# Altium PCB WiFi_Shield_PCB.PcbDoc
Units mil, origin at the board's own origin, x right, y up, seen from the top; angles counter-clockwise.
Board outline 1771.65 x 1771.65 mil, 2 copper layers (Top Layer, Bottom Layer), stack 61.811 mil thick; 20 components, 15 nets, 87 pads, 52 vias.
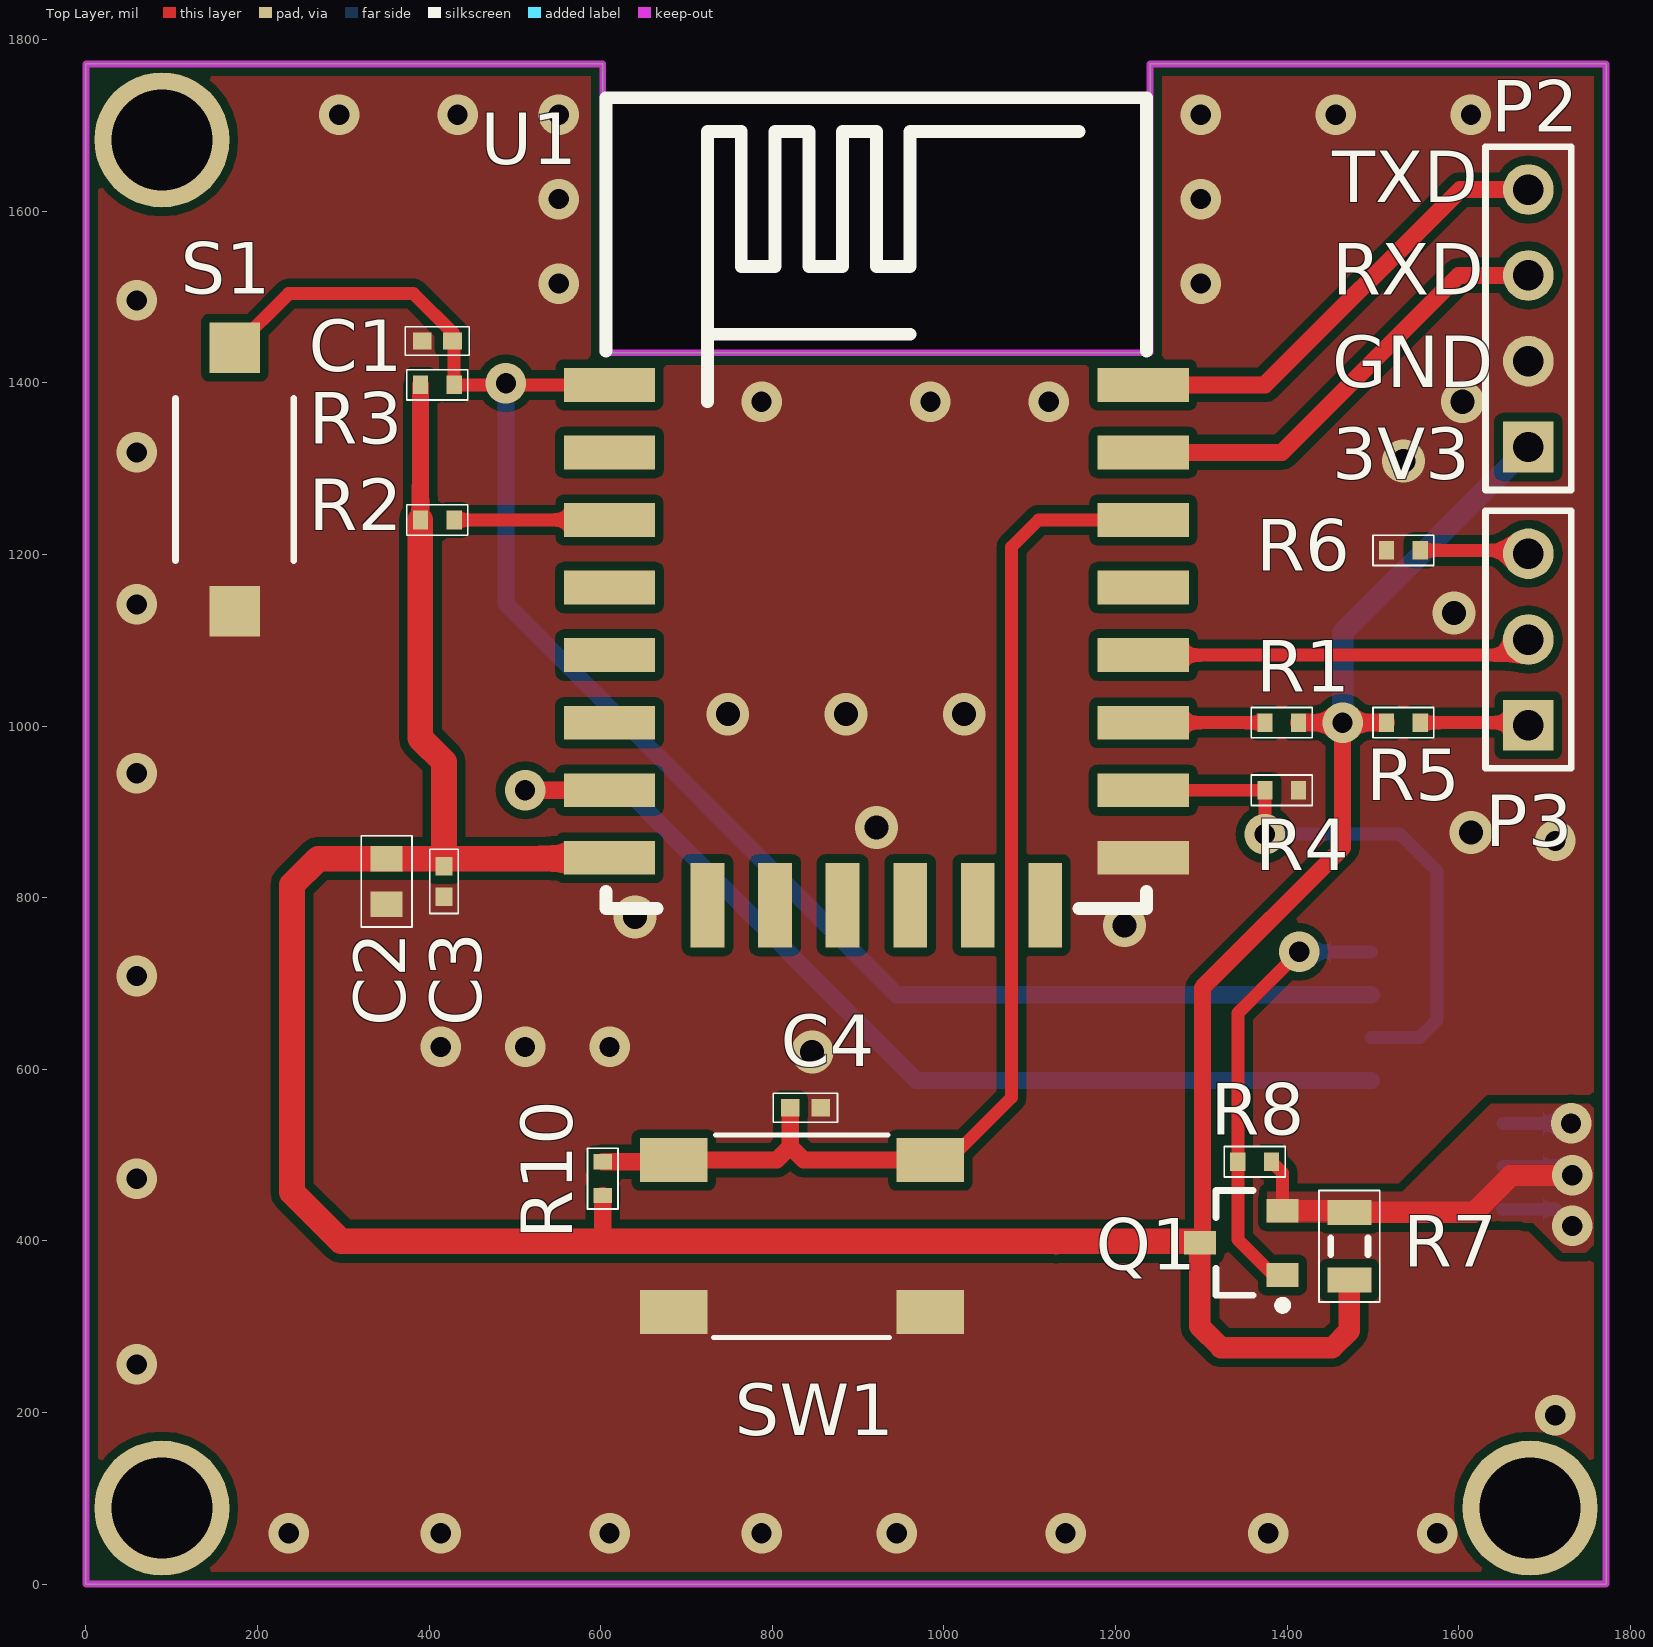
[diagram p0: Top Layer view]
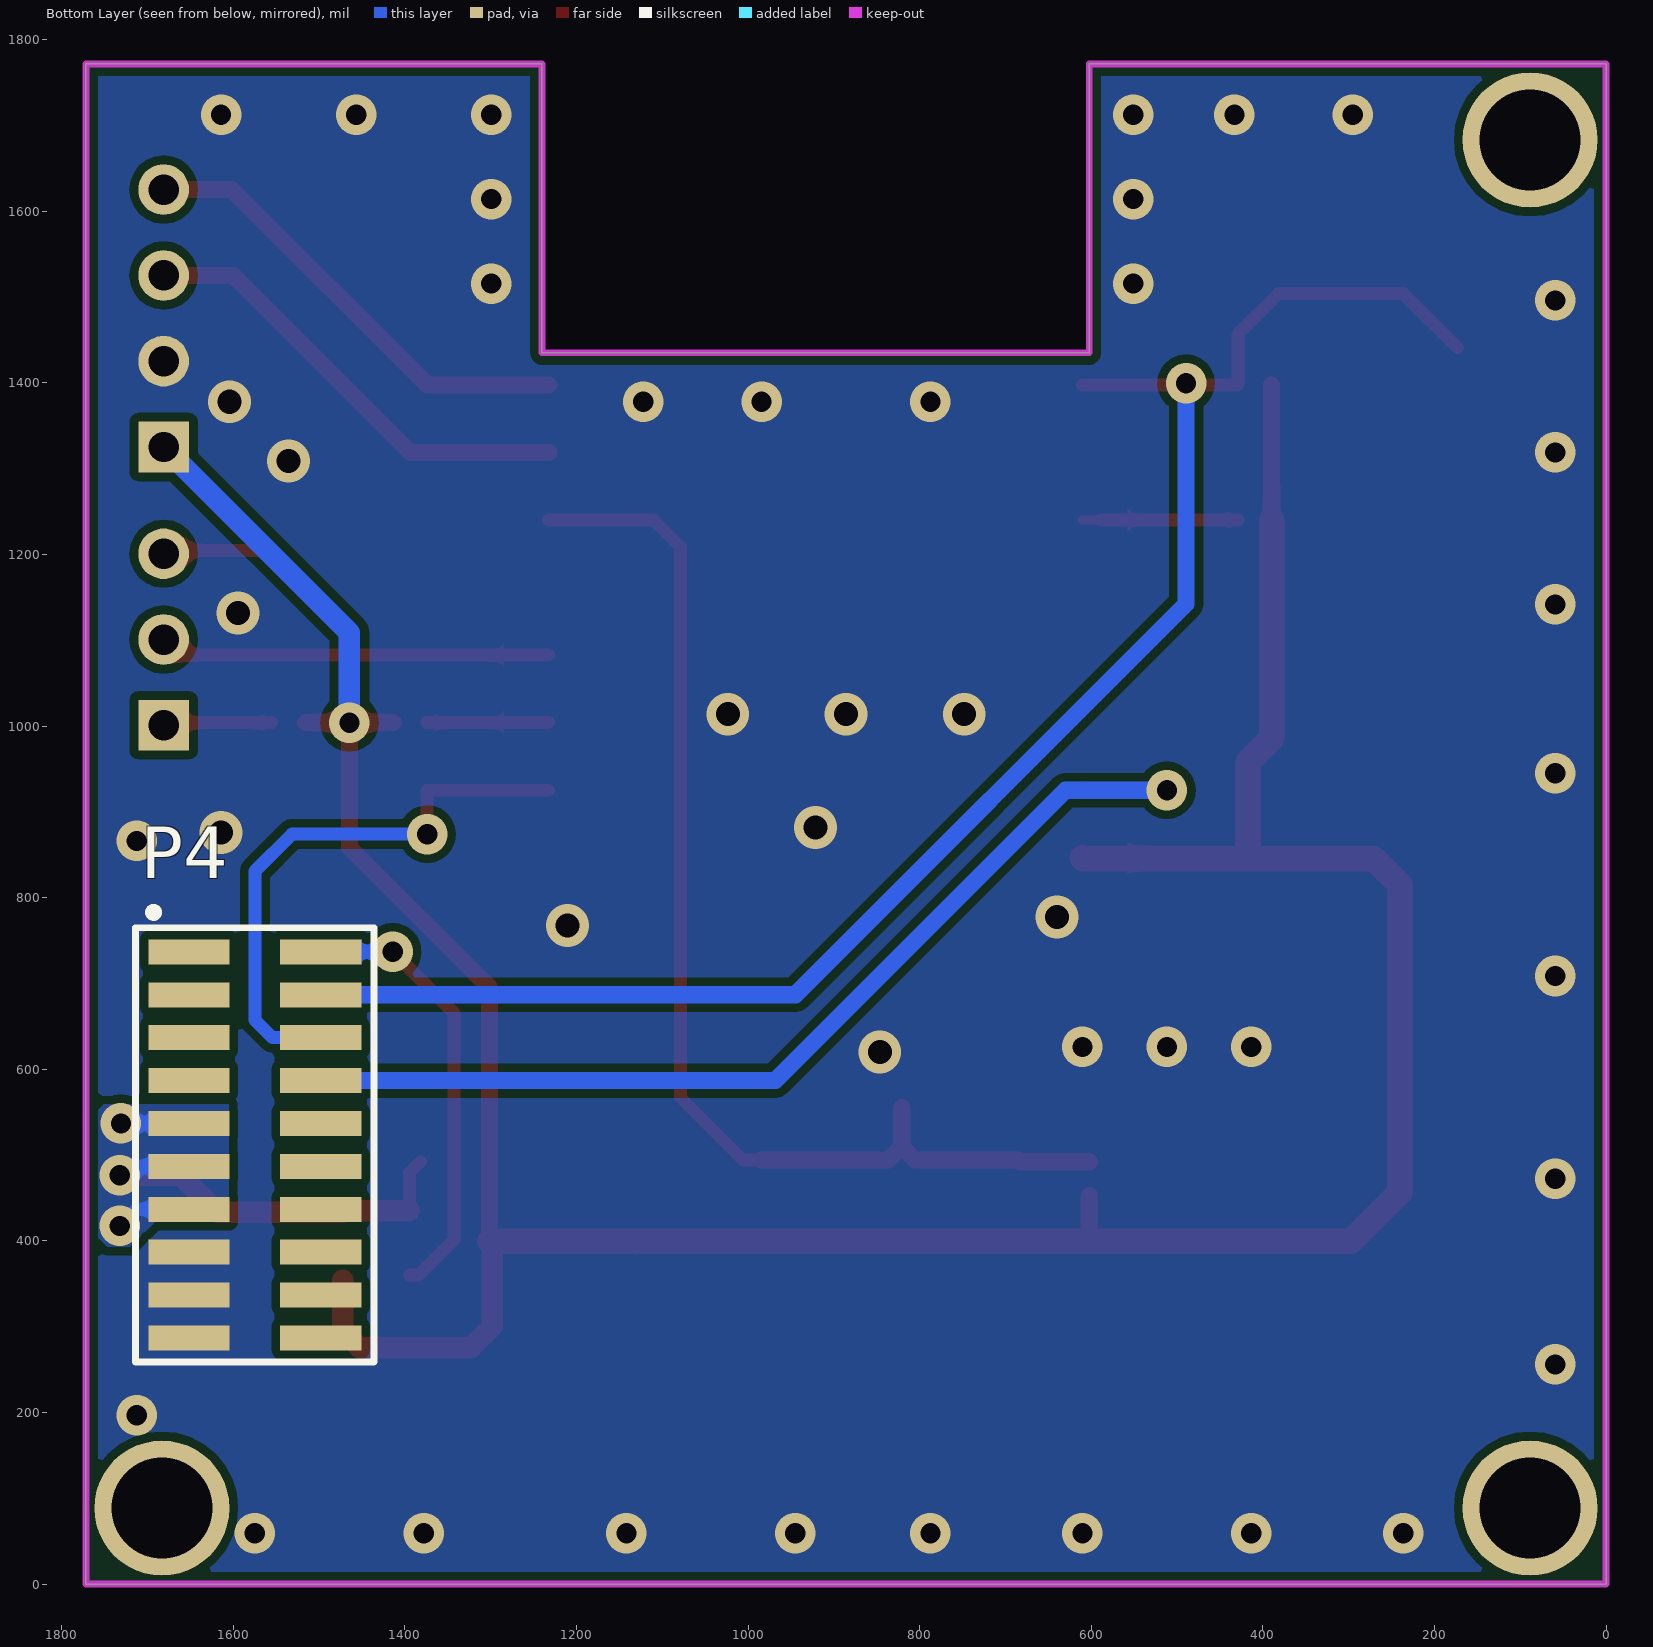
[diagram p1: Bottom Layer view, seen from below]
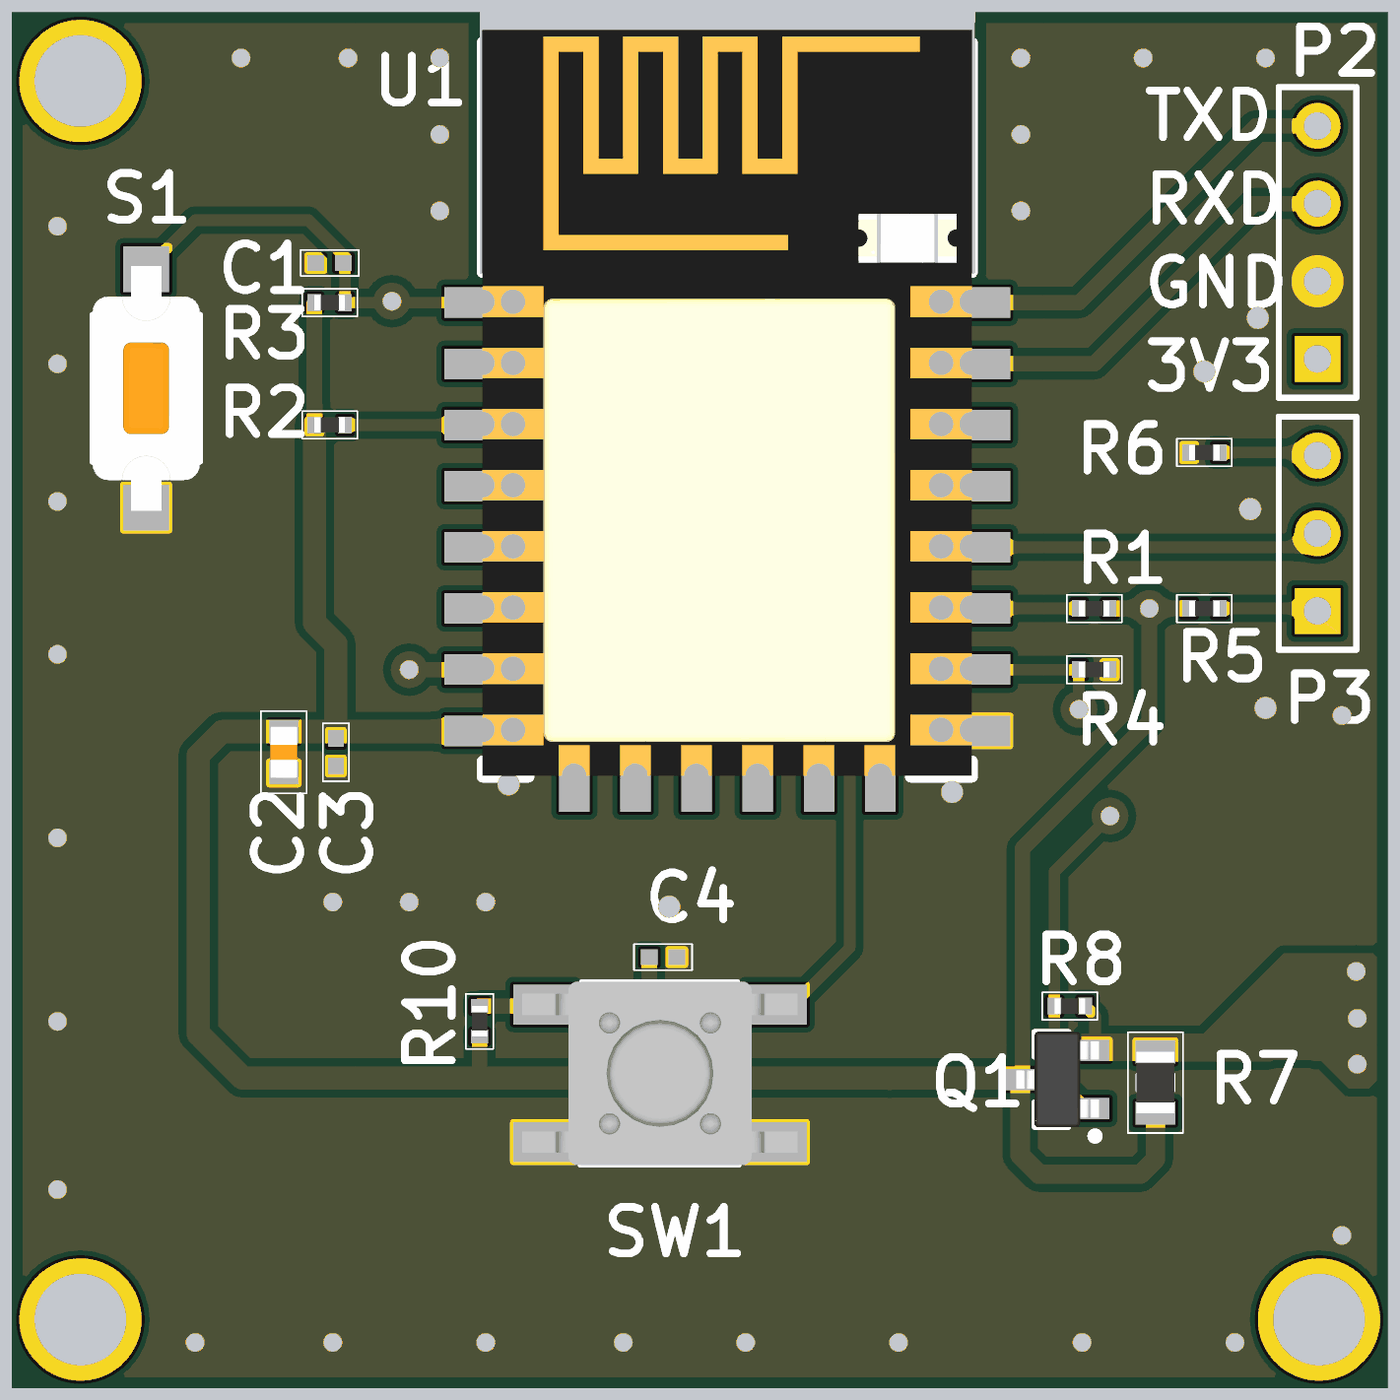
[diagram p2: 3D render of the assembled board from above, using the file's embedded part models]

## Layer stack, top to bottom
Top Solder: solder mask 0.3937, Solder Resist, Dk 3.5
Top Layer: signal copper 1.378
Dielectric 1: dielectric 59.0551, FR-4, Dk 4.8
Bottom Layer: signal copper 1.378
Bottom Solder: solder mask 0.3937, Solder Resist, Dk 3.5

## Board outline
0,0 0,1771.65 602.36,1771.65 602.36,1435.04 1240.16,1435.04 1240.16,1771.65 1771.65,1771.65 1771.65,0

## Design rules (kind name [scope] priority, off if disabled: settings)
Clearance Clearance_GND [All vs InPolygon] p1: gap=10 ignorepadtopadclearanceinfootprint=FALSE
Clearance [All] p2: gap=8 ignorepadtopadclearanceinfootprint=FALSE
HoleSize [All] p1: absolutevalues=TRUE maxlimit=1000 minlimit=1 maxpercent=80.000 minpercent=20.000
HoleToHoleClearance [All] p1: gap=1 allowstackedmicrovias=TRUE
MinimumSolderMaskSliver [All] p1: minsoldermaskwidth=1
PolygonConnect [All] p1: connectstyle=Direct reliefconductorwidth=10 reliefentries=4 polygonreliefangle="90 Angle" airgapwidth=10
RoutingVias [All] p1: holewidth=11.81 width=23.62 viastyle="Through Hole" minholewidth=11.81 minwidth=23.62 maxholewidth=23.62 maxwidth=47.24
SilkToSilkClearance [All] p1: silktosilkclearance=1
SilkToSolderMaskClearance [IsPad] p1: minsilkscreentomaskgap=1 clearancetoexposedcopper=TRUE
SolderMaskExpansion [All] p1: expansion=4
Width [All] p1: maxlimit=40 minlimit=10 preferedwidth=15
25 further rules are at their usual default settings.

## Components (designator, comment, footprint, x,y, rotation, side; value= is the part's Value field where it differs from the comment)
C1 "0.1µF" C0402M 409.45,1448.82 r180 top
C2 "10µF" C0603M 350.39,818.9 r90 top
C3 "0.1µF" C0402M 417.32,818.9 r270 top
C4 "0.10µF" C0402M 838.58,555.12 r0 top
P2 "Header 4" HDR1X4 1681.1,1325.2 r90 top
P3 "Header 3" HDR1X3 1681.1,1000.79 r90 top
P4 "MHDR2X10" MHDR2X10SMDM 1574.8,511.81 r0 bottom
Q1 "AO3401" SOT95P240X120-3N 1346.46,397.64 r180 top
R1 "10k" R0402M 1393.7,1003.94 r0 top
R2 "10k" R0402M 409.45,1240.16 r180 top
R3 "10k" R0402M 409.45,1397.64 r180 top
R4 "10k" R0402M 1393.7,925.2 r180 top
R5 "10k" R0402M 1535.43,1003.94 r180 top
R6 "10k" R0402M 1535.43,1204.72 r180 top
R7 "0.0/DNM" R0805M 1472.44,393.7 r270 top
R8 "10k" R0402M 1362.2,492.13 r180 top
R10 "10k" R0402M 602.36,472.44 r90 top
S1 "RS-282G05A3-SM RT" RS-282G05A3 173.23,1287.4 r270 top
SW1 "PTS645SL70SMTR92LFS" PTS645SL70SMTR92LFS 834.65,405.51 r180 top
U1 "ESP-12e" ESP-12E 625.98,1397.64 r0 top

## Footprints (in the part's own frame and the unit in brackets; to place one, negate y for a bottom-side part, rotate by r counter-clockwise, add the part's x,y. Pads: shape width x height; smd on the part's side, far side on the other; paste and mask are expansions set on the pad)
C0402M [mm] "Capacitor 0402"
  rect 0.55x0.51 smd: 1(-0.45,0) 2(0.45,0)
  silkscreen extent -0.95,-0.43 0.95,0.43, body extent -0.53,-0.28 0.53,0.27, height 0.55
C0603M [mm] "Chip Capacitor 0603"
  rect 0.75x0.95 smd: 1(-0.675,0) 2(0.675,0)
  silkscreen extent -1.35,-0.75 1.35,0.75, body extent -0.85,-0.45 0.85,0.45, height 0.9
ESP-12E [mm] "ESP8266 Wifi Module - ESP 07"
  rect 2.7x1 smd: 1(-0.4,0) 2(-0.4,-2) 3(-0.4,-4) 4(-0.4,-6) 5(-0.4,-8) 6(-0.4,-10) 7(-0.4,-12) 8(-0.4,-14) 15(15.4,-14) 16(15.4,-12) 17(15.4,-10) 18(15.4,-8) 19(15.4,-6) 20(15.4,-4) 21(15.4,-2) 22(15.4,0)
  rect 1x2.5 smd: 9(2.5,-15.4) 10(4.5,-15.4) 11(6.5,-15.4) 12(8.5,-15.4) 13(10.5,-15.4) 14(12.5,-15.4)
  silkscreen extent -0.5,-15.5 15.5,8.5, body extent -0.51,-15.47 15.49,8.91, height 3
HDR1X3 [mm] "Connector; Header; 3 Position"
  rect 1.5x1.5 hole 0.9: 1(0,0)
  round 1.5 hole 0.9: 2(2.54,0) 3(5.08,0)
  silkscreen extent -1.27,-1.27 6.35,1.27
HDR1X4 [mm] "Connector; Header; 4 Position"
  rect 1.5x1.5 hole 0.9: 1(0,0)
  round 1.5 hole 0.9: 2(2.54,0) 3(5.08,0) 4(7.62,0)
  silkscreen extent -1.27,-1.27 8.89,1.27
MHDR2X10SMDM [mm]
  rect 2.4x0.74 smd: 1(1.95,-5.715) 2(-1.95,-5.715) 3(1.95,-4.445) 4(-1.95,-4.445) 5(1.95,-3.175) 6(-1.95,-3.175) 7(1.95,-1.905) 8(-1.95,-1.905) 9(1.95,-0.635) 10(-1.95,-0.635) 11(1.95,0.635) 12(-1.95,0.635) 13(1.95,1.905) 14(-1.95,1.905) 15(1.95,3.175) 16(-1.95,3.175) 17(1.95,4.445) 18(-1.95,4.445) 19(1.95,5.715) 20(-1.95,5.715)
  silkscreen extent -3.53,-7.01 3.53,6.43, body extent -2.7,-6.35 2.8,6.35, height 6.4
PTS645SL70SMTR92LFS [mm]
  rect 2x1.3 smd: 1(-3.8,2.25) 2(3.8,2.25) 3(-3.8,-2.25) 4(3.8,-2.25)
  silkscreen extent -2.59,-3 2.62,3, body extent -4.5,-3 4.5,3, height 7
R0402M [mm] "Chip Resistor 0402"
  rect 0.45x0.55 smd: 1(-0.5,0) 2(0.5,0)
  silkscreen extent -0.9,-0.45 0.9,0.45, body extent -0.5,-0.25 0.5,0.25, height 0.4
R0805M [mm] "Chip Resistor 0805"
  rect 0.75x1.3 smd: 1(-1,0) 2(1,0)
  silkscreen extent -1.65,-0.9 1.65,0.9, body extent -1,-0.63 1,0.63, height 0.6
RS-282G05A3 [mm]
  rect 1.5x1.5 smd: 1(-3.9,0) 2(3.9,0)
  silkscreen extent -2.4,-1.75 2.4,1.75, body extent -4,-1.75 4,1.75, height 4.3
SOT95P240X120-3N [mm] "SOT23, 3-Leads, Body 2.92x2.40mm, Pitch 0.95mm, IPC Medium Density"
  rect 0.95x0.7 smd: 1(-1.225,0.95) 2(-1.225,-0.95) 3(1.225,0)
  silkscreen extent -1.35,-1.55 0.75,1.97, body extent -1.35,-1.56 1.35,1.56, height 1.2

## Part data
C1 C3: library part CAPN, Manufacturer="Murata Electronics North America", Manufacturer Part Number=GRM155R61C104KA88J, Operating Temperature="-55°C ~ 85°C", Package / Case="0402 (1005 Metric)", Ratings=-, Supplier Part Number 1=490-6310-1-ND, Temperature Coefficient=X5R, Tolerance=±10%, Voltage - Rated=16V, Applications="General Purpose", Category=Capacitors, ComponentLink1Description=https://www.murata.com/~/media/webrenewal/support/library/catalog/products/capacitor/mlcc/c02e.ashx, ComponentLink1URL=https://www.murata.com/~/media/webrenewal/support/library/catalog/products/capacitor/mlcc/c02e.ashx, Features=-, Height - Seated (Max)=-, Lead Spacing=-, Mounting Type="Surface Mount, MLCC", Notification="Current market demand for these product types have resulted in fluctuating and extending lead times. Lead times may differ.", Packaging="Cut Tape (CT)", Part Status=Active, Pricing 1="1=0.1, 10=0.035, 100=0.0155, 500=0.01106, 1000=0.0087, 2500=0.00791, 5000=0.00727 (USD)", RoHS="RoHS Compliant", Size / Dimension="0.039\" L x 0.020\" W (1.00mm x 0.50mm)", Stock 1=500000, Supplier 1=Digi-Key, Thickness (Max)="0.022\" (0.55mm)"
C2: library part CAPSMD, "CAP CER 10UF 10V X5R 0603", Manufacturer="Taiyo Yuden", Manufacturer Part Number=LMK107BBJ106MAHT, Operating Temperature="-55°C ~ 85°C", Package / Case="0603 (1608 Metric)", Ratings=AEC-Q200, Supplier Part Number 1=587-3412-1-ND, Temperature Coefficient=X5R, Tolerance=±20%, Voltage - Rated=10V, Applications=Automotive, Capacitance=10µF, Category=Capacitors, ComponentLink1Description=http://ds.yuden.co.jp/TYCOMPAS/ut/detail.do?productNo=LMK107BBJ106MAHT&fileName=LMK107BBJ106MAHT_SS&mode=specSheetDownload, ComponentLink1URL=http://ds.yuden.co.jp/TYCOMPAS/ut/detail.do?productNo=LMK107BBJ106MAHT&fileName=LMK107BBJ106MAHT_SS&mode=specSheetDownload, Features=-, Height - Seated (Max)=-, Lead Spacing=-, Lead Style=-, Mounting Type="Surface Mount, MLCC", Packaging="Cut Tape (CT)", Part Status=Active, Pricing 1="1=0.44, 10=0.309, 100=0.1852, 500=0.1389, 1000=0.11729 (USD)", RoHS="RoHS Compliant", Size / Dimension="0.063\" L x 0.032\" W (1.60mm x 0.80mm)", Stock 1=455125, Supplier 1=Digi-Key, Thickness (Max)="0.035\" (0.90mm)"
C4: library part CAPN, "CAP CER 0.1UF 10V X5R 0402", Manufacturer="Taiyo Yuden", Manufacturer Part Number=LMK105BJ104KV-F, Manufacturer Part Number 2=LMK105BJ104MV-F, Operating Temperature="-55°C ~ 85°C", Package / Case="0402 (1005 Metric)", Ratings=-, Supplier Part Number 1=587-1227-1-ND, Temperature Coefficient=X5R, Tolerance=±10%, Voltage - Rated=10V, Applications="General Purpose", Capacitance=0.10µF, Category=Capacitors, Category 2=Capacitors, ComponentLink1Description=http://ds.yuden.co.jp/TYCOMPAS/ut/detail.do?productNo=LMK105BJ104KV-F&fileName=LMK105BJ104KV-F_SS&mode=specSheetDownload, ComponentLink1URL=http://ds.yuden.co.jp/TYCOMPAS/ut/detail.do?productNo=LMK105BJ104KV-F&fileName=LMK105BJ104KV-F_SS&mode=specSheetDownload, ComponentLink2Description=http://ds.yuden.co.jp/TYCOMPAS/ut/detail.do?productNo=LMK105BJ104MV-F&fileName=LMK105BJ104MV-F_SS&mode=specSheetDownload, ComponentLink2URL=http://ds.yuden.co.jp/TYCOMPAS/ut/detail.do?productNo=LMK105BJ104MV-F&fileName=LMK105BJ104MV-F_SS&mode=specSheetDownload, Description 2="CAP CER 0.1UF 10V X5R 0402", Features=-, Height - Seated (Max)=-, Lead Spacing=-, Lead Style=-, Manufacturer 2="Taiyo Yuden", Module="IPCAM SoC", Mounting Type="Surface Mount, MLCC", Notification="Current market demand for these product types have resulted in fluctuating and extending lead times. Lead times may differ.", Packaging="Cut Tape (CT)", Part Status=Active, Pricing 1="1=0.1, 10=0.025, 50=0.012, 100=0.009, 250=0.00652, 500=0.0048, 1000=0.00325, 5000=0.0025 (USD)", Pricing 2="1=0.1, 10=0.043, 100=0.019, 500=0.0136, 1000=0.01069, 2500=0.00972, 5000=0.00894 (USD)", RoHS="RoHS Compliant", RoHS 2="RoHS Compliant", Size / Dimension="0.039\" L x 0.020\" W (1.00mm x 0.50mm)", Stock 1=12292406, Stock 2=17700, Supplier 1=Digi-Key, Supplier 2=Digi-Key, Supplier Part Number 2=587-2835-1-ND, Thickness (Max)="0.022\" (0.55mm)"
P2: "Header, 4-Pin", LatestRevisionDate=17-Jul-2002, LatestRevisionNote="Re-released for DXP Platform.", Publisher="Altium Limited"
P3: "Header, 3-Pin", LatestRevisionDate=17-Jul-2002, LatestRevisionNote="Re-released for DXP Platform.", Publisher="Altium Limited"
P4: "Header, 10-Pin, Dual row", LatestRevisionDate=17-Jul-2002, LatestRevisionNote="Re-released for DXP Platform.", Publisher="Altium Limited"
Q1: library part MOSFET-P1, "P-Channel MOSFET"
R1 R2 R3 R4 R5 R6 R8: library part RES_SMD, "RES SMD 10K OHM 1% 1/16W 0402", Manufacturer="Vishay Dale", Manufacturer Part Number=CRCW040210K0FKEDC, Operating Temperature="-55°C ~ 155°C", Package / Case="0402 (1005 Metric)", Power (Watts)="0.063W, 1/16W", Supplier Device Package=0402, Supplier Part Number 1=541-3959-1-ND, Temperature Coefficient=±100ppm/°C, Tolerance=±1%, Category=Resistors, ComponentLink1Description=http://www.vishay.com/docs/28773/crcwce3.pdf, ComponentLink1URL=http://www.vishay.com/docs/28773/crcwce3.pdf, Composition="Thick Film", Failure Rate=-, Features=-, Height - Seated (Max)="0.014\" (0.35mm)", Packaging="Cut Tape (CT)", Part Status=Active, Pricing 1="1=0.1, 10=0.026, 100=0.0104, 1000=0.00466, 2500=0.00405, 5000=0.00334 (USD)", RoHS="RoHS Compliant", Size / Dimension="0.039\" L x 0.020\" W (1.00mm x 0.50mm)", Stock 1=336311, Supplier 1=Digi-Key
R7: library part RES_SMD
R10: library part RES_SMD, "RES SMD 10K OHM 1% 1/16W 0402", Manufacturer 1=Yageo, Manufacturer Part Number 1=AT0402FRE0710KL, Operating Temperature="-55°C ~ 155°C", Package / Case="0402 (1005 Metric)", Power (Watts)="0.063W, 1/16W", Supplier Device Package=0402, Supplier Part Number 1=YAG2104CT-ND, Temperature Coefficient=±50ppm/°C, Tolerance=±1%, Category 1=Resistors, ComponentLink1Description=http://www.yageo.com/documents/recent/PYu-AT_51_RoHS_L_5.pdf, ComponentLink1URL=http://www.yageo.com/documents/recent/PYu-AT_51_RoHS_L_5.pdf, Composition="Thin Film", Description 1="RES SMD 10K OHM 1% 1/16W 0402", Failure Rate=-, Features="Anti-Sulfur, Automotive AEC-Q200, Moisture Resistant", Height - Seated (Max)="0.014\" (0.35mm)", Packaging="Cut Tape (CT)", Part Status=Active, Pricing 1="1=0.15, 10=0.125, 100=0.049, 1000=0.02051, 2500=0.0188, 5000=0.01709 (USD)", RoHS 1="RoHS Compliant", Size / Dimension="0.039\" L x 0.020\" W (1.00mm x 0.50mm)", Stock 1=128581, Supplier 1=Digi-Key
S1: library part SW-PB, "SWITCH TACTILE SPST-NO 0.05A 12V", Contact Rating @ Voltage="0.05A @ 12VDC", Illumination Type, Color=-, Manufacturer=C&K, Operating Force=250gf, Supplier Part Number 1=CKN10384CT-ND, Actuator Height off PCB, Vertical=2.50mm, Actuator Length, Right Angle=-, Actuator Material="Polyamide (PA), Nylon", Actuator Orientation="Top Actuated", Actuator Type="Rectangular Button", Category=Switches, Circuit=SPST-NO, ComponentLink1Description=https://media.digikey.com/pdf/Data%20Sheets/C&K/RS-282G05A-SM_RT.pdf, ComponentLink1URL=https://media.digikey.com/pdf/Data%20Sheets/C&K/RS-282G05A-SM_RT.pdf, Features=-, Illumination=Non-Illuminated, Illumination Voltage (Nominal)=-, Ingress Protection=-, Manufacturer Part Number="RS-282G05A3-SM RT", Mechanical Life="50,000 Cycles", Mounting Type="Surface Mount", Operating Temperature=-, Outline="6.00mm x 3.60mm", Packaging="Cut Tape (CT)", Part Status=Active, Pricing 1="1=0.81, 10=0.78, 25=0.7356, 50=0.6474, 100=0.5885, 250=0.55908, 500=0.54436, 1000=0.42666 (USD)", RoHS="RoHS Compliant", Stock 1=55078, Supplier 1=Digi-Key, Switch Function=Off-Mom, Switch Travel=0.25mm, Termination Style="Gull Wing"
SW1: library part A08-0790, "SWITCH TACTILE SPST-NO 0.05A 12V", Contact Rating @ Voltage="0.05A @ 12VDC", Illumination Type, Color=-, Manufacturer 1=C&K, Operating Force=130gf, Operating Temperature="-20°C ~ 60°C", Supplier Part Number 1=CKN10820CT-ND, Actuator Height off PCB, Vertical=7.00mm, Actuator Length, Right Angle=-, Actuator Material="Polyamide (PA66), Nylon 6/6", Actuator Orientation="Top Actuated", Actuator Type=Standard, Category 1=Switches, Circuit=SPST-NO, ComponentLink1Description=http://www.ckswitches.com/media/1471/pts645.pdf, ComponentLink1URL=http://www.ckswitches.com/media/1471/pts645.pdf, Description 1="SWITCH TACTILE SPST-NO 0.05A 12V", Features=-, Illumination=Non-Illuminated, Illumination Voltage (Nominal)=-, Ingress Protection=-, Manufacturer Part Number 1=PTS645SL70SMTR92LFS, Mechanical Life="100,000 Cycles", Mounting Type="Surface Mount", Outline="6.00mm x 6.00mm", Packaging="Cut Tape (CT)", Part Status=Active, Pricing 1="1=0.29, 10=0.28, 25=0.2704, 50=0.2606, 100=0.2461, 250=0.23164 (USD)", RoHS 1="RoHS Compliant", Stock 1=9940, Supplier 1=Digi-Key, Switch Function=Off-Mom, Switch Travel=-, Termination Style="Gull Wing"
U1: "ESP8266 SMT MODULE", Current - Receiving="50mA ~ 56mA", Current - Transmitting="120mA ~ 170mA", Frequency=2.4GHz, Manufacturer="Adafruit Industries LLC", Manufacturer Part Number=2491, Operating Temperature="-40°C ~ 125°C", Package / Case=Module, Power - Output=20.5dBm, Supplier Part Number 1=1528-1438-ND, Voltage - Supply="3 V ~ 3.6 V", Antenna Type="Integrated, Trace", Category="RF/IF and RFID", ComponentLink1Description=https://www.adafruit.com/images/product-files/2471/0A-ESP8266__Datasheet__EN_v4.3.pdf, ComponentLink1URL=https://www.adafruit.com/images/product-files/2471/0A-ESP8266__Datasheet__EN_v4.3.pdf, Data Rate=72.2Mbps, Memory Size=-, Modulation=-, Mounting Type="Surface Mount", Packaging=Bulk, Part Status=Obsolete, Pricing 1="1=6.95 (USD)", Protocol=802.11b/g/n, RF Family/Standard=WiFi, RoHS="RoHS Compliant", Sensitivity=-98dBm, Serial Interfaces="I²C, I²S, SPI, UART", Stock 1=493, Supplier 1=Digi-Key, Utilized IC / Part=ESP8266

## Free pads (board coordinates)
  round 157.48 hole 118.11: ""(88.58,88.58) ""(88.58,1683.07) ""(1683.07,88.58)

## Via types
v1: diameter 47.24, hole 23.62, Top Layer to Bottom Layer, tented both sides, 41 vias
v2: diameter 50, hole 28, Top Layer to Bottom Layer, tented both sides, 11 vias

## Nets (pads, with @x,y where several pads share a name; then routed paths per layer and width w, separated by ;. In a path a pad name is that pad's centre, name@x,y a point inside that pad or via, vN(x,y) a via of type N, cw(c..) or ccw(c..) an arc to the next point about the centre after c; other vN are vias at no path point)
BTN1: C4.1 R10.2 SW1.3 SW1.4 U1.20 | length 1374
  Top Layer w15: SW1.3 1005.91,494.09 1078.74,566.93 1078.74,1208.66 1110.24,1240.16 U1.20
  Top Layer w20: R10.2 683.07,492.13 SW1.4 805.12,494.09 820.87,509.84 ; C4.1 820.87,509.84 ; SW1.3 836.61,494.09 820.87,509.84
DC_3V3: P4.9 P4.11 P4.13 Q1.2 R7.1 R8.1 | length 671.9
  Top Layer w15: R8.1 1394.68,479.33 Q1.2
  Top Layer w25: Q1.2 1470.47,435.04 R7.1 1618.11,433.07 1661.42,476.38 v1(1732.28,476.38)
  Bottom Layer w15: P4.13 1712.8,436.81 v1(1732.28,417.32) ; P4.11 1721.85,486.81 v1(1732.28,476.38) ; P4.9 v1(1730.91,536.81)
ESP_EN: R2.1 U1.3 | length 181.1
  Top Layer w10: U1.3@588.52,1240.16 U1.3
  Top Layer w15: R2.1 U1.3@588.52,1240.16
ESP_RST: C1.1 P4.4 R3.1 S1.1 U1.1 | length 1996.2
  Top Layer w15: S1.1 236.22,1503.94 381.89,1503.94 429.13,1456.69 R3.1 U1.1
  Bottom Layer w20: v1(489.52,1399.52) 489.52,1142.17 944.88,686.81 P4.4
ESP_RXD: P2.3 U1.21 | length 534.3
  Top Layer w20: U1.21 1393.7,1318.9 1600,1525.2 P2.3
ESP_RXD2: P4.8 U1.7 | length 1224.8
  Top Layer w20: v1(511.81,925.2) U1.7
  Bottom Layer w20: v1(511.81,925.2) 629.92,925.2 968.31,586.81 P4.8
ESP_TXD: P2.4 U1.22 | length 543.1
  Top Layer w20: U1.22 1374.02,1397.64 1601.57,1625.2 P2.4
ESP_TXD2: P4.6 R4.2 U1.16 | length 670.2
  Top Layer w15: U1.16 R4.2 v1(1374.02,874.02)
  Bottom Layer w15: v1(1374.02,874.02) 1531.5,874.02 1574.8,830.71 1574.8,657.48 1554.13,636.81 P4.6
GND: C1.2 C2.1 C3.2 C4.2 P2.2 P4.15 P4.17 P4.19 R4.1 R6.2 S1.2 SW1.1 SW1.2 U1.15
  other v1: 236.22,59.06 413.39,59.06 610.24,59.06 787.4,59.06 944.88,59.06 1141.73,59.06 1377.95,59.06 1574.8,59.06 1712.6,196.85 59.06,255.91 59.06,472.44 413.39,625.98 511.81,625.98 610.24,625.98 59.06,708.66 1712.6,866.14 59.06,944.88 59.06,1141.73 59.06,1318.9 787.4,1377.95 984.25,1377.95 1122.05,1377.95 59.06,1496.06 551.18,1515.75 1299.21,1515.75 551.18,1614.17 1299.21,1614.17 295.28,1712.6 433.07,1712.6 551.18,1712.6 1299.21,1712.6 1456.69,1712.6 1614.17,1712.6
  other v2: 846.46,620.08 1210.63,767.72 639.76,777.56 1614.17,875.98 921.26,881.89 748.03,1013.78 885.83,1013.78 1023.62,1013.78 1594.49,1131.89 1535.43,1309.06 1604.33,1377.95
GPIO0: P3.2 U1.18 | length 456.3
  Top Layer w15: U1.18 1662.99,1082.68 P3.2
GPIO2: R1.1 U1.17 | length 141.7
  Top Layer w15: U1.17 R1.1
MOD_EN: P4.2 Q1.1 R8.2 | length 518.2
  Top Layer w15: Q1.1 1383.86,360.24 1342.52,401.57 R8.2 1342.52,665.35 v1(1413.98,736.81)
  Bottom Layer w15: v1(1413.98,736.81) P4.2
NetP3_1: P3.1 R5.1 | length 127.3
  Top Layer w15: R5.1 1677.95,1003.94 P3.1
NetP3_3: P3.3 R6.1 | length 127.6
  Top Layer w15: R6.1 1677.17,1204.72 P3.3
VCC: C2.2 C3.1 P2.1 Q1.3 R1.2 R2.2 R3.2 R5.2 R7.2 R10.1 U1.8 | length 3981.6
  Top Layer w20: R2.2 R3.2 ; 602.36,399.61 R10.1 ; Q1.3@1301.18,399.61 1301.18,694.88 1464.57,858.27 v1(1464.57,1003.94) ; R1.2 v1(1464.57,1003.94) ; R5.2 v1(1464.57,1003.94)
  Top Layer w25: 1130.71,396.46 1133.86,399.61 ; Q1.3 1298.23,300.2 1322.83,275.59 1452.76,275.59 1472.44,295.28 R7.2
  Top Layer w30: R2.2 389.76,985.76 417.32,958.2 C3.1@417.32,845.47 ; U1.8 609.25,845.47 C3.1@417.32,845.47 ; Q1.3@1301.18,399.61 1133.86,399.61 602.36,399.61 297.24,399.61 240.16,456.69 240.16,814.96 270.67,845.47 C2.2 C3.1@417.32,845.47
  Bottom Layer w25: v1(1464.57,1003.94) 1464.57,1108.66 P2.1
pads on no net: P4.1 P4.3 P4.5 P4.7 P4.10 P4.12 P4.14 P4.16 P4.18 P4.20 U1.2 U1.4 U1.5 U1.6 U1.9 U1.10 U1.11 U1.12 U1.13 U1.14 U1.19

## Polygon pours and split planes (outlines as drawn)
GND on Bottom Layer "GND_L02_P008" (solid, remove dead copper, pour order 8): 0,0 0,1771.65
DC_3V3 on Bottom Layer "DC_3V3_L02_P012" (solid, remove dead copper, pour order 12): 1605,559 1751,559 1761,549 1761,407 1747,393 1720,393 1691,422 1605,422
GND on Bottom Layer "GND_L02_P018" (solid, remove dead copper, pour order 18): 0,0 0,1771.65 1771.65,1771.65 1771.65,0
DC_3V3 on Top Layer "DC_3V3_L01_P014" (solid, remove dead copper, pour order 14): 1377,421 1686,421 1721,386 1748,386 1764,402 1764,548 1752,560 1637,560 1534,457 1377,457
GND on Top Layer "GND_L01_P016" (solid, remove dead copper, pour order 16): 0,0 1771.65,0 1771.65,1771.65 0,1771.65

## Keep-outs
Keep-Out Layer:
  the board outline again, w8

## Silkscreen, mask and mechanical layers (free items; w line width, h text height)
Top Overlay:
  text "TXD" at 1452.76,1610.24 h60
  text "RXD" at 1452.76,1502.62 h60
  text "GND" at 1452.76,1395.01 h60
  text "3V3" at 1452.76,1287.4 h60
Mechanical 29:
  text "U1" at 889,1105 h60